# Altium PCB PCB1.PcbDoc
Units mil, origin at the board's own origin, x right, y up, seen from the top; angles counter-clockwise.
Board outline 6000 x 4000 mil, 2 copper layers (Top Layer, Bottom Layer); 60 components, 44 nets, 172 pads, 26 vias.
Unrouted connection lines stored in the file: 71.
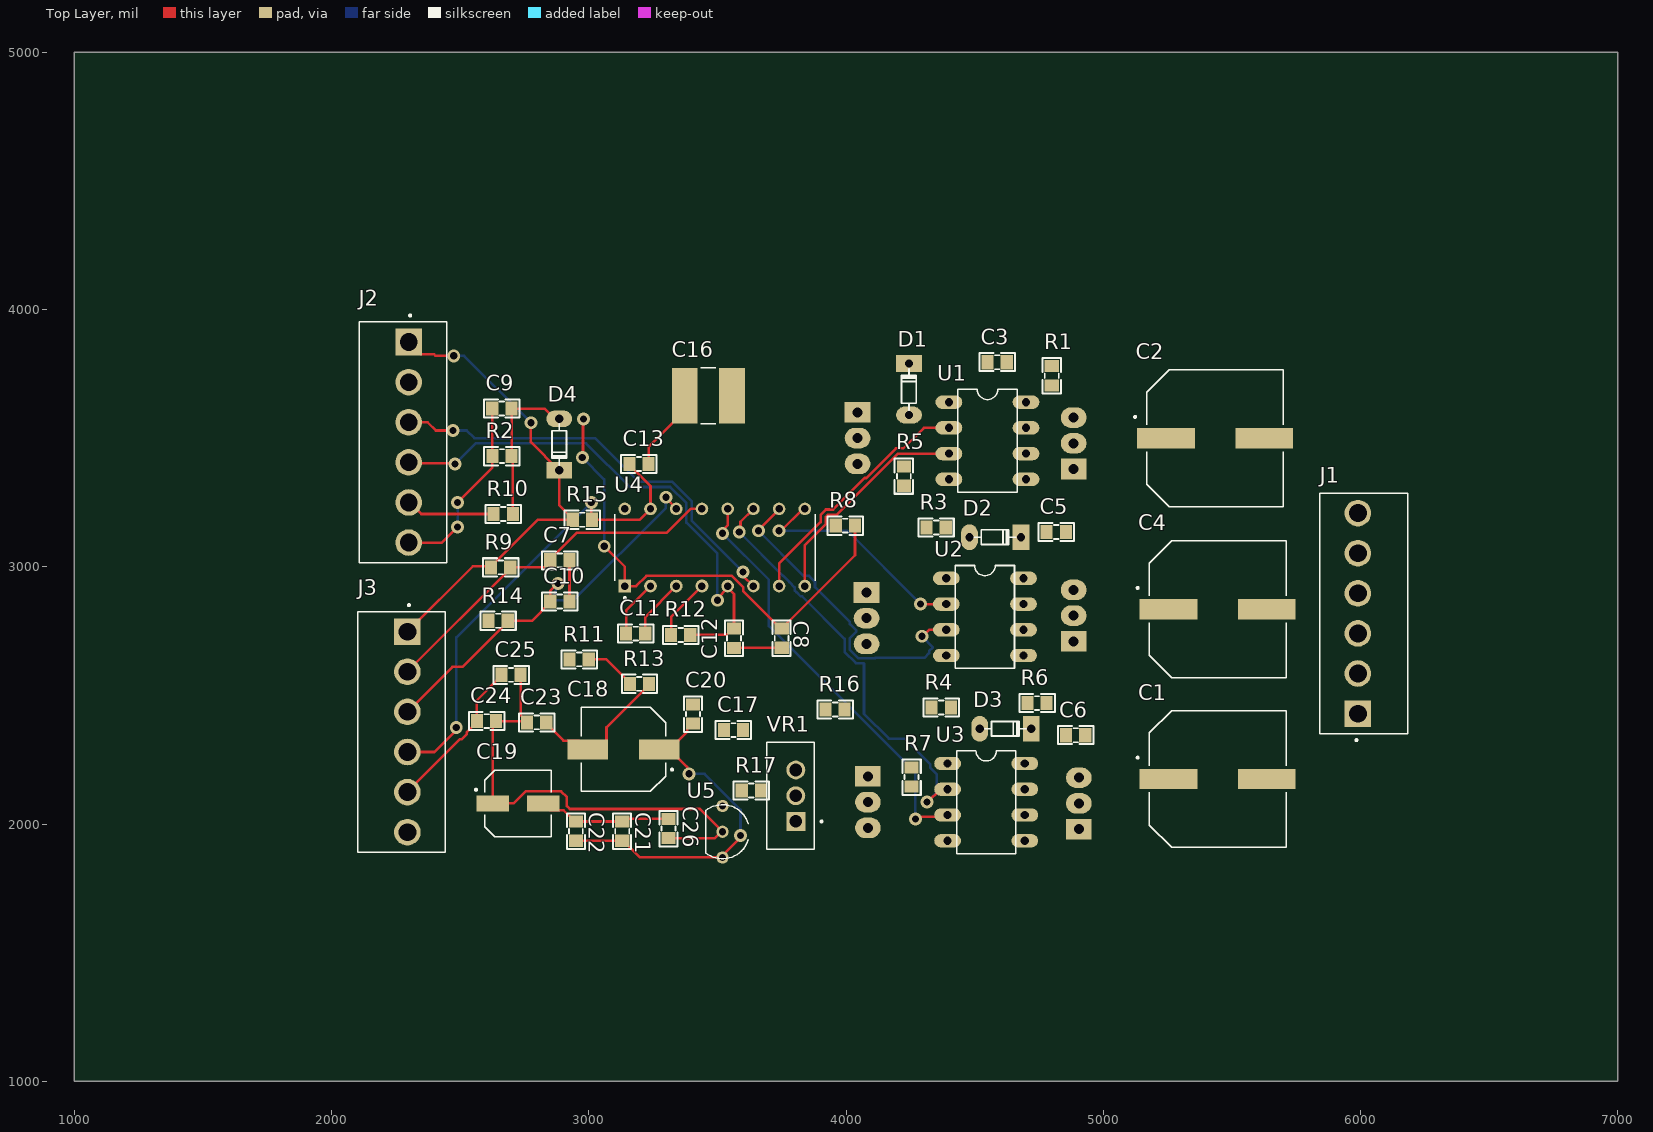
[diagram p0: Top Layer view]
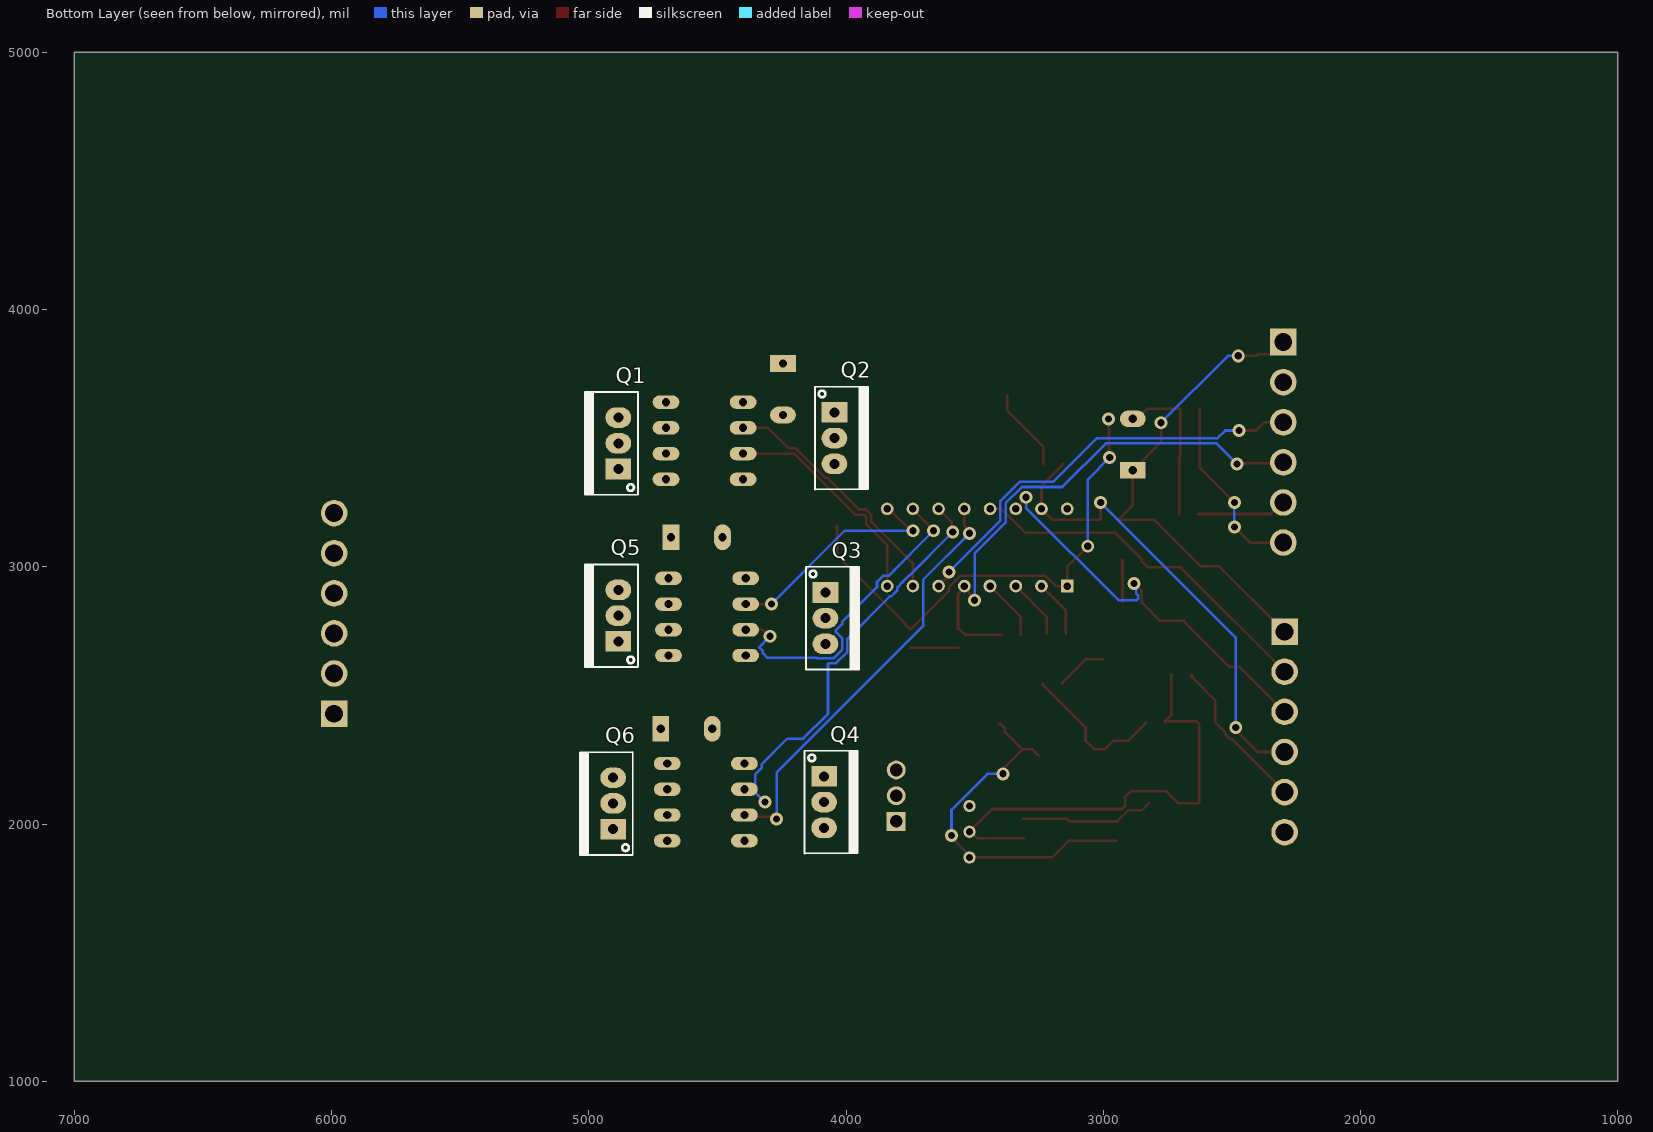
[diagram p1: Bottom Layer view, seen from below]

## Layer stack, top to bottom
Top Solder: solder mask 0.4, Solder Resist, Dk 3.5
Top Layer: signal copper 1.4
Dielectric 1: dielectric 12.6, FR-4, Dk 4.8
Bottom Layer: signal copper 1.4
Bottom Solder: solder mask 0.4, Solder Resist, Dk 3.5

## Board outline
1000,1000 7000,1000 7000,5000 1000,5000

## Design rules (kind name [scope] priority, off if disabled: settings)
Clearance Clearance_2 [All] p1: gap=10 ignorepadtopadclearanceinfootprint=FALSE
Clearance 15V [InNet('15V')] p2: gap=10 ignorepadtopadclearanceinfootprint=FALSE except(20: Arc-Arc Arc-Track Track-Track)
Clearance [All] p3: gap=10 ignorepadtopadclearanceinfootprint=FALSE
PolygonConnect [All] p1: connectstyle=Relief reliefconductorwidth=10 reliefentries=4 polygonreliefangle="90 Angle" airgapwidth=10
RoutingVias [All] p1: holewidth=28 width=50 viastyle="Through Hole" minholewidth=28 minwidth=50 maxholewidth=28 maxwidth=50
SolderMaskExpansion [All] p1: expansion=4 istentingtop=FALSE
SupplyNets "Schematic Supply Nets_2" [InNet('VCC')] p1: voltage=0.000
SupplyNets "Schematic Supply Nets_1" [InNet('+5')] p2: voltage=0.000
SupplyNets "Schematic Supply Nets" [InNet('GND')] p3: voltage=0.000
Width [All] p1: maxlimit=10 minlimit=10 preferedwidth=10
Width GND [InNet('GND')] p2: maxlimit=62 minlimit=19 preferedwidth=47 minimp=50.000000 maximp=50.000000 favimp=50.000000
Width 5V [InNet('+5')] p3: maxlimit=62 minlimit=19 preferedwidth=47 minimp=50.000000 maximp=50.000000 favimp=50.000000
30 further rules are at their usual default settings.

## Classes and differential pairs
net class Power: 15V +5 GND VCC

## Components (designator, comment, footprint, x,y, rotation, side; value= is the part's Value field where it differs from the comment)
C1 "100uF/63V" CAP_EEVTG1J101Q 5445,2175 r0 top
C2 "100uF/63V" CAP_EEVTG1J101Q 5435,3500 r0 top
C3 "105P" "tu 0805" 4587.23,3795.13 r0 top
C4 "100uF/63V" CAP_EEVTG1J101Q 5445,2835 r0 top
C5 "105P" "tu 0805" 4817.23,3135.13 r0 top
C6 "105P" "tu 0805" 4892.43,2345.13 r0 top
C7 "103" "tu 0805" 2887.43,3025.13 r0 top
C8 "104P" "tu 0805" 3749.87,2722.23 r90 top
C9 "105" "tu 0805" 2662.57,3614.87 r180 top
C10 "103" "tu 0805" 2887.23,2865.13 r0 top
C11 "474" "tu 0805" 3182.23,2740.13 r0 top
C12 "104P" "tu 0805" 3564.87,2722.43 r270 top
C13 "103" "tu 0805" 3195,3400 r0 top
C16 "47uF/50V" CAPC6050X550N 3465,3665 r0 top
C17 "104P" "tu 0805" 3562.43,2365.13 r0 top
C18 "100uF/25V" CAP_EEEHA1E101AP 3135,2290 r180 top
C19 "47uF/16V" CAP_EEE1CA470AP 2725,2080 r0 top
C20 "104P" "tu 0805" 3404.87,2427.43 r90 top
C21 "104P" "tu 0805" 3129.87,1972.23 r90 top
C22 "104P" "tu 0805" 2949.87,1972.23 r90 top
C23 "104P" "tu 0805" 2797.23,2395.13 r0 top
C24 "104P" "tu 0805" 2602.77,2399.87 r180 top
C25 "104P" "tu 0805" 2697.77,2579.87 r180 top
C26 "104P" "tu 0805" 3309.87,1982.23 r90 top
D1 "1N4148" "DIODE 0.5A"#1 4245,3690 r270 top
D2 "1N4148" "DIODE 0.5A"#1 4580,3115 r180 top
D3 "1N4148" "DIODE 0.5A"#1 4620,2370 r180 top
D4 "1N4148" "DIODE 0.5A"#2 2885,3475 r90 top
J1 "OUT" VALCON_VH396-06S-010 5990,2818.86 r90 top
J2 "CON4" VALCON_VH396-06S-010 2300,3483.86 r270 top
J3 "CON5" VALCON_VH396-06S-010 2295,2357.95 r270 top
Q1 "IRF3709" TO220 4885,3380 r90 bottom
Q2 "IRF3709" TO220 4045,3600 r270 bottom
Q3 "IRF3709" TO220 4080,2900 r270 bottom
Q4 "IRF3709" TO220 4085,2185 r270 bottom
Q5 "IRF3709" TO220 4885,2710 r90 bottom
Q6 "IRF3709" TO220 4905,1980 r90 bottom
R1 "100R" "tro smd 0805" 4802.39,3742.77 r270 top
R2 "100K" "tro smd 0805" 2662.43,3432.39 r0 top
R3 "100R" "tro smd 0805" 4350,3155 r0 top
R4 "100R" "tro smd 0805" 4370,2455 r0 top
R5 "100R" "tro smd 0805" 4227.39,3352.77 r270 top
R6 "100R" "tro smd 0805" 4742.77,2467.61 r180 top
R7 "100R" "tro smd 0805" 4252.61,2182.43 r90 top
R8 "4.7K" "tro smd 0805" 3997.43,3162.39 r0 top
R9 "2.2K" "tro smd 0805" 2657.43,3000.13 r0 top
R10 "10K" "tro smd 0805" 2667.23,3207.39 r0 top
R11 "10K" "tro smd 0805" 2962.43,2642.39 r0 top
R12 "10K" "tro smd 0805" 3357.57,2732.61 r180 top
R13 "1k" "tro smd 0805" 3197.23,2542.39 r180 top
R14 "2.2K" "tro smd 0805" 2647.23,2792.39 r0 top
R15 "2.2K" "tro smd 0805" 2975,3185 r0 top
R16 "10K" "tro smd 0805" 3957.57,2442.61 r180 top
R17 "1K" "tro smd 0805" 3632.23,2132.39 r0 top
U1 "IR2101" DIL08 4545,3490 r0 top
U2 "IR2101" DIL08 4535,2805 r0 top
U3 "IR2101" DIL08 4540,2085 r0 top
U4 "SN754410NEE4" DIP762W45P254L1980H508Q16 3490,3075 r90 top
U5 "78L05ACZ" TO-92 3520,1970 r270 top
VR1 "LM317T/NOPB" TO254P1054X470X1955-3 3805,2110 r90 top

## Footprints (in the part's own frame and the unit in brackets; to place one, negate y for a bottom-side part, rotate by r counter-clockwise, add the part's x,y. Pads: shape width x height; smd on the part's side, far side on the other; paste and mask are expansions set on the pad)
CAP_EEE1CA470AP [mm]
  rect 3.2x1.6 smd: 1(-2.5,0) 2(2.5,0)
  silkscreen extent -4.25,-3.3 3.3,3.3, body extent -3.65,-3.3 3.65,3.3, height 5.8
CAP_EEEHA1E101AP [mm]
  rect 4x2 smd: 1(-3.55,0) 2(3.55,0)
  silkscreen extent -4.9,-4.15 4.15,4.15, body extent -4.85,-4.15 4.85,4.15, height 10.2
CAP_EEVTG1J101Q [mm]
  rect 5.7x2 smd: 1(-4.85,0) 2(4.85,0)
  silkscreen extent -8,-6.75 6.75,6.75, body extent -7.45,-6.75 7.45,6.75, height 13.5
CAPC6050X550N [mm]
  rect 2.53x5.51 smd: 1(-2.336,0) 2(2.336,0)
  silkscreen extent -0.75,-2.75 0.75,2.75, body extent -3,-2.5 3,2.5, height 5.5
DIL08 [mil]
  oval 104x52 hole 32: 1(-145,150) 2(-145,50) 3(-145,-50) 4(-145,-150) 5(155,-150) 6(155,-50) 7(155,50) 8(155,150)
  silkscreen extent -110,-200 120,200, body extent -151,-200 161,190, height 210
"DIODE 0.5A"#1 [mil] "Diode muoi, xung"
  oval 65x100 hole 32: 1(100,0)
  rect 65x100 hole 32: 2(-100,0)
  silkscreen extent -80,-30 80,28, body extent -108,-33 108,32, height 61
"DIODE 0.5A"#2 [mil] "Diode muoi, xung"
  rect 65x100 hole 32: 2(-100,0)
  oval 65x100 hole 32: ""(100,0)
  silkscreen extent -80,-30 80,28, body extent -108,-33 108,32, height 61
DIP762W45P254L1980H508Q16 [mm]
  rect 1.248x1.248 hole 0.74: 1(-3.81,8.89)
  round 1.248 hole 0.74: 2(-3.81,6.35) 3(-3.81,3.81) 4(-3.81,1.27) 5(-3.81,-1.27) 6(-3.81,-3.81) 7(-3.81,-6.35) 8(-3.81,-8.89) 9(3.81,-8.89) 10(3.81,-6.35) 11(3.81,-3.81) 12(3.81,-1.27) 13(3.81,1.27) 14(3.81,3.81) 15(3.81,6.35) 16(3.81,8.89)
  silkscreen extent -5.1,-9.9 3.3,9.9, body extent -3.81,-9.78 3.81,10.03, height 5.08
TO220 [mil] "TO-220"
  rect 80x100 hole 39: 1(0,0)
  oval 80x100 hole 39: 2(100,0) 3(200,0)
  silkscreen extent -100,-76 300,130, body extent -95,-80 295,97, height 323
TO254P1054X470X1955-3 [mm]
  rect 1.86x1.86 / inner round 1.86 / far side rect 1.86x1.86 hole 1.24: 1(-2.54,0)
  round 1.86 hole 1.24: 2(0,0) 3(2.54,0)
  silkscreen extent -5.27,-2.64 5.27,2.86, body extent -5.1,-2.25 5.1,2.25, height 19.68
TO-92 [mm]
  round 1.208 hole 0.7: 1(-2.54,0) 2(0,0) 3(2.54,0)
  silkscreen extent -2.66,-1.65 2.66,2.55, body extent -2.41,-1.84 2.41,1.84, height 5.34
"tro smd 0805" [mm]
  rect 1.2x1.4 smd: 1(-0.946,-0.061) 2(0.954,-0.061)
  silkscreen extent -1.75,-0.97 1.75,0.84, body extent -1.56,-0.76 1.44,0.64, height 0.53
"tu 0805" [mm] "Compoment SMD 80x50mil"
  rect 1.2x1.4 smd: 1(-0.946,-0.003) 2(0.954,-0.003)
  silkscreen extent -1.75,-0.89 1.75,0.89, body extent -1.01,-0.64 1.01,0.63, height 0.61
VALCON_VH396-06S-010 [mm]
  rect 2.625x2.625 / inner round 2.625 / far side rect 2.625x2.625 hole 1.75: 01(-9.9,0)
  round 2.625 hole 1.75: 02(-5.94,0) 03(-1.98,0) 04(1.98,0) 05(5.94,0) 06(9.9,0)
  silkscreen extent -12.62,-4.9 11.88,3.75, body extent -11.88,-4.9 11.88,3.75, height 10.9

## Part data
C1 C2 C4: library part EEVTG1J101Q, "100ÂµF 63V Aluminum Electrolytic Capacitors Radial, Can - SMD 260mOhm @ 100kHz 2000 Hrs @ 125Â°C", Package="RADIAL-2 Panasonic", Availability="In Stock", Check_prices=https://www.snapeda.com/parts/EEVTG1J101Q/Panasonic/view-part/?ref=eda, MF=Panasonic, MP=EEVTG1J101Q, Price=None, Purchase-URL=https://pricing.snapeda.com/search/part/EEVTG1J101Q/?ref=eda, SnapEDA_Link=https://www.snapeda.com/parts/EEVTG1J101Q/Panasonic/view-part/?ref=snap
C3 C5 C6 C8 C9 C11 C12 C20 C21 C22 C23 C24 C25 C26: library part "Tu 0805 472 50V 20%", "Dán", Chung_Loai=Dán, Don_Vi=Con, Ma_Hang=MH004363, So_Chan=2, Ten_Linh_Kien="Tụ 0805 472-4.7nF 20% 50V"
C7 C10 C13: library part "Tu 0805 471 50V 10%", "Dán", Chung_Loai=Dán, Don_Vi=Con, Ma_Hang=MH004564, So_Chan=2, Ten_Linh_Kien="Tụ 0805 471-470 10% 50V"
C16: library part CKG57NX7R1H476M500JJ, Package="6050 TDK", Availability="In Stock", Check_prices=https://www.snapeda.com/parts/CKG57NX7R1H476M500JJ/TDK/view-part/?ref=eda, MF=TDK, MP=CKG57NX7R1H476M500JJ, Price=None, Purchase-URL=https://pricing.snapeda.com/search/part/CKG57NX7R1H476M500JJ/?ref=eda, SnapEDA_Link=https://www.snapeda.com/parts/CKG57NX7R1H476M500JJ/TDK/view-part/?ref=snap
C17: library part "Tu 0805 472 50V 20%", "Tu 0805 472 50V 20% / SMD", Chung_Loai=Dán, Don_Vi=Con, Ma_Hang=MH004363, So_Chan=2, Ten_Linh_Kien="Tụ 0805 472-4.7nF 20% 50V"
C18: library part EEEHA1E101AP, "100ÂµF 25V Aluminum Electrolytic Capacitors Radial, Can - SMD 1000 Hrs @ 105Â°C", Package="RADIAL-2 Panasonic", Availability="In Stock", Check_prices=https://www.snapeda.com/parts/EEE-HA1E101AP/Panasonic/view-part/?ref=eda, MF=Panasonic, MP=EEE-HA1E101AP, Price=None, Purchase-URL=https://pricing.snapeda.com/search/part/EEE-HA1E101AP/?ref=eda, SnapEDA_Link=https://www.snapeda.com/parts/EEE-HA1E101AP/Panasonic/view-part/?ref=snap
C19: library part EEE1CA470AP, "47ÂµF 16V Aluminum Electrolytic Capacitors Radial, Can - SMD 2000 Hrs @ 85Â°C", Package="RADIAL-2 Panasonic", Availability="In Stock", Check_prices=https://www.snapeda.com/parts/EEE-1CA470AP/Panasonic/view-part/?ref=eda, MF=Panasonic, MP=EEE-1CA470AP, Price=None, Purchase-URL=https://pricing.snapeda.com/search/part/EEE-1CA470AP/?ref=eda, SnapEDA_Link=https://www.snapeda.com/parts/EEE-1CA470AP/Panasonic/view-part/?ref=snap
D1 D2 D3 D4: library part "Diode 1N4148", "Cắm", Chung_Loai=Cắm, Don_Vi=Con, Ma_Hang=MH001065, Ten_Linh_Kien="Diode 1N4148 DO35 450mA 100V ( 1N4148 DIP)"
J1 J2 J3: library part VH396-06S-010, "VH396 - Valcon 3.96mm 5A Wire-to-Board Straight Locking Power Connector", Package=None, Availability="In Stock", Check_prices=https://www.snapeda.com/parts/VH396-06S-010/Valcon/view-part/?ref=eda, MF=Valcon, MP=VH396-06S-010, Price=None, Purchase-URL=https://pricing.snapeda.com/search/part/VH396-06S-010/?ref=eda, SnapEDA_Link=https://www.snapeda.com/parts/VH396-06S-010/Valcon/view-part/?ref=snap
Q1 Q2 Q3 Q4 Q5 Q6: library part "IRF3709 DIP", "N-Channel Power MOSFET"
R1 R2 R3 R4 R5 R6 R7 R8 R9 R10 R11 R12 R13 R14 R15 R16 R17: library part "Tro 0805 1% 1k", "Dán", Chung_Loai=Dán, Don_Vi=Con, Ma_Hang=MH005468, So_Chan=2, Ten_Linh_Kien="Trở 0805 1% 1k"
U1 U2 U3: "Half-Bridge Gate Driver IC Non-Inverting 8-PDIP", Package="DIP-8 International Rectifier", Check_prices=https://www.snapeda.com/parts/IR2101/Infineon+Technologies/view-part/?ref=eda, Digi-Key_Part_Number=IR2101-ND, MF=Infineon, MP=IR2101, Purchase-URL=https://pricing.snapeda.com/search/part/IR2101/?ref=eda, SnapEDA_Link=https://www.snapeda.com/parts/IR2101/Infineon+Technologies/view-part/?ref=snap
U4: "Quadruple Half-H Drivers 16-PDIP -40 to 85", Package="PDIP-16 Texas Instruments", Availability="In Stock", Check_prices=https://www.snapeda.com/parts/SN754410NEE4/Texas+Instruments/view-part/?ref=eda, MF="Texas Instruments", MP=SN754410NEE4, Price=None, Purchase-URL=https://pricing.snapeda.com/search/part/SN754410NEE4/?ref=eda, SnapEDA_Link=https://www.snapeda.com/parts/SN754410NEE4/Texas+Instruments/view-part/?ref=snap
U5: "Linear Voltage Regulator IC Positive Fixed 1 Output 100mA TO-92-3", Package="TO-92 ON", Availability="In Stock", Check_prices=https://www.snapeda.com/parts/78L05ACZ/STMicroelectronics/view-part/?ref=eda, MF=STMicroelectronics, MP=78L05ACZ, Price=None, Purchase-URL=https://pricing.snapeda.com/search/part/78L05ACZ/?ref=eda, SnapEDA_Link=https://www.snapeda.com/parts/78L05ACZ/STMicroelectronics/view-part/?ref=snap
VR1: "Linear Voltage Regulator IC Positive Adjustable 1 Output 1.5A TO-220-3", Package="TO-220-3 STMicroelectronics", Check_prices=https://www.snapeda.com/parts/LM317T/STMicroelectronics/view-part/?ref=eda, MF=STMicroelectronics, MP=LM317T, SnapEDA_Link=https://www.snapeda.com/parts/LM317T/STMicroelectronics/view-part/?ref=snap

## Via types
v1: diameter 50, hole 28, Top Layer to Bottom Layer, 26 vias

## Nets (pads, with @x,y where several pads share a name; then routed paths per layer and width w, separated by ;. In a path a pad name is that pad's centre, name@x,y a point inside that pad or via, vN(x,y) a via of type N, cw(c..) or ccw(c..) an arc to the next point about the centre after c; other vN are vias at no path point)
15V: R17.1 VR1.2
+5: D4.2 J2.01 J3.01 R8.1 R9.1 R12.2 R14.1 R15.1 U4.4 | length 2112.2
  Top Layer w10: J3.01 2548.96,3001.68 2620.2,3001.68 2801.12,3182.61 R15.1 2937.77,3186.54 2885,3239.32 D4.2 2775,3485 v1(2775,3560) ; J2.01 2346.67,3826.95 2398.12,3826.95 2405.07,3820 v1(2475,3820) ; R12.2 3320,2805 3439.57,2924.57 v1(3440,2924.57)
  Bottom Layer w10: v1(2475,3820) 2515,3820 v1(2775,3560)
AB: U1.3 U4.8 | length 883
  Top Layer w10: U4.8 3840,3083.91 3921.57,3165.49 3921.57,3193.77 3930.36,3202.56 3965.16,3202.56 4202.61,3440 U1.3
AT: U1.2 U4.7 | length 982.4
  Top Layer w10: U4.7 3740,3012.2 3901.57,3173.77 3901.57,3202.06 3922.08,3222.56 3950.36,3222.56 4072.8,3345 4079.32,3345 4194.32,3460 4222.61,3460 4302.61,3540 U1.2
BB: U2.3 U4.10 | length 1285.5
  Top Layer w10: v1(3660,3140) 3660,3142.5 3740,3222.5 U4.10 ; v1(4295,2730) 4298,2730 4323,2755 U2.3
  Bottom Layer w10: v1(3660,3140) 3835.43,2964.57 3856.39,2964.57 3879.57,2941.39 3879.57,2920.43 4015,2785 4015,2777.22 4040,2752.22 4040,2747.78 4015,2722.78 4015,2677.22 4047.22,2645 4112.78,2645 4113.89,2646.11 4305,2646.11 4323,2664.11 4323,2671.98 4338.01,2686.99 v1(4295,2730)
BT: U2.2 U4.9 | length 903.3
  Top Layer w10: v1(3740,3140) 3747.5,3140 3832.5,3225 U4.9 ; v1(4290,2855) U2.2
  Bottom Layer w10: v1(3740,3140) 4005,3140 v1(4290,2855)
CB: U3.3 U4.12 | length 1655.2
  Top Layer w10: v1(3520,3130) 3520,3140.82 3540,3160.82 U4.12 ; v1(4270,2020) 4277.5,2027.5 4387.5,2027.5 U3.3
  Bottom Layer w10: v1(3520,3130) 3700.43,2949.57 3700.43,2769.57 4270,2200 v1(4270,2020)
CT: U3.2 U4.11 | length 1653.3
  Top Layer w10: v1(3585,3135) 3590,3140 3590,3175 U4.11 ; v1(4315,2085) 4317,2085 4367,2135 U3.2
  Bottom Layer w10: v1(3585,3135) 3755.43,2964.57 3756.39,2964.57 3779.57,2941.39 3779.57,2940.43 3800.43,2919.57 3800.43,2908.61 3807.02,2902.02 3823.61,2885.43 3829.57,2885.43 3995,2720 3995,2668.93 4038.93,2625 4067.22,2625 4070,2622.22 4070,2428.28 4166.64,2331.64 4228.36,2331.64 4328,2232 4328,2218.02 4352.02,2194 4352.02,2122.02 v1(4315,2085)
EL: C8.2 J2.02 R8.2 U4.1 | length 1961
  Top Layer w10: v1(2975,3425) 2977.5,3427.5 2977.5,3572.5 v1(2980,3575) ; v1(3060,3080) 3140,3000 U4.1 3184.04,2925 3223.61,2964.57 3556.39,2964.57 3600.43,2920.52 3600.43,2905.43 3746.06,2759.8 C8.2 3753.94,2759.8 3772.56,2778.43 3772.56,2782.36 4035,3044.8 R8.2
  Bottom Layer w10: v1(2975,3425) 3060,3340 v1(3060,3080)
GND: C1.2 C2.2 C4.2 C7.2 C8.1 C9.2 C10.2 C11.2 C12.2 C13.2 C16.1 C17.2 C18.2 C19.2 C20.2 C21.2 C22.2 C23.2 C24.2 C25.2 C26.2 J1.02 J2.06 J3.05 R2.1 R13.1 R16.2 U1.4 U2.4 U3.4 U4.3 | length 3352.4
  Top Layer w10: J3.05 2295,2125.87 2499.13,2330 2506.57,2330 2525,2348.43 2525,2355.87 2565.2,2396.06 C24.2 2565.2,2481.06 2655,2570.87 2655,2580 C25.2 ; J2.06 2429.09,3094.09 v1(2490,3155) ; v1(2490,3250) 2625.2,3385.2 R2.1 2625,3430.2 C9.2 ; C19.2 2849.92,2053.5 2902.36,2053.5 2946.06,2009.8 C22.2 C21.2 3140,2019.8 C26.2 ; C23.2 2834.8,2391.06 2901.5,2324.37 2960.87,2324.37 C18.2 3034.61,2290 3068.98,2324.37 3068.98,2375.37 3234.46,2540.85 R13.1 ; C10.2 2925,2865.2 C7.2 ; C11.2 3219.8,2804.8 U4.3 ; C13.2 3232.57,3465.88 3373.03,3606.34 C16.1 ; C12.2 3564.88,2685 C8.1
  Bottom Layer w10: v1(2490,3155) v1(2490,3250)
Ha: C7.1 J3.02 R9.2 U4.13 | length 1415.4
  Top Layer w10: J3.02 2295,2593.8 2695,2993.8 R9.2 2826.87,2997.74 2850.2,3021.06 C7.1 2850.2,3028.94 2953.79,3132.54 3303.49,3132.54 3395.96,3225 U4.13
Hb: C10.1 J3.03 R14.2 U4.14 | length 1575
  Top Layer w10: J3.03 2469.7,2610.6 2509.34,2610.6 2684.8,2786.06 R14.2 2778.94,2790 2850,2861.06 C10.1 2850,2905 v1(2880,2935) ; v1(3300,3270) 3300,3267.5 3340,3227.5 U4.14
  Bottom Layer w10: v1(2880,2935) 2872.35,2927.35 2872.35,2896.52 2864.14,2888.32 2864.14,2875.86 2870,2870 2940.96,2870 3300,3229.04 v1(3300,3270)
Hc: C13.1 J3.04 R15.2 U4.15 | length 1857.2
  Top Layer w10: J3.04@2295,2287.2 J3.04 2400,2280 2485,2365 v1(2485,2375) ; v1(3010,3250) 3010,3185.18 R15.2 3197.61,3182.61 U4.15 3240,3313.7 3157.77,3395.93 C13.1
  Bottom Layer w10: v1(2485,2375) 2485,2725 v1(3010,3250)
IOUT: Q2.3 Q5.3 Q6.3 R11.2 R13.2 | length 201.4
  Top Layer w10: R11.2 3068.38,2640 3159.65,2548.72 R13.2
Is: C11.1 R11.1 U4.2 | length 224.4
  Top Layer w10: C11.1 3145,2830 U4.2
M: J2.03 U4.6 | length 1656.4
  Top Layer w10: J2.03 2373.52,3561.81 2405.46,3529.86 v1(2472.2,3529.86) ; v1(3600,2980) 3600,2965 U4.6
  Bottom Layer w10: v1(2472.2,3529.86) 2525.14,3529.86 2555,3500 3025,3500 3195,3330 3324.85,3330 3399.57,3255.29 3399.57,3180.43 v1(3600,2980)
MA: C3.2 J1.05 Q1.3 Q2.2 U1.6
MB: C5.2 J1.04 Q3.3 Q5.2 U2.6
MC: C6.2 J1.03 Q4.3 Q6.2 U3.6
NetC3_1: C3.1 D1.2 U1.8
NetC5_1: C5.1 D2.2 U2.8
NetC6_1: C6.1 D3.2 U3.8
NetC9_1: C9.1 D4. R2.2 R10.2 | length 613.8
  Top Layer w10: R10.2 2704.8,3425.2 R2.2 2700,3614.8 C9.1 2827.5,3615 2867.5,3575 D4.
NetC18_1: C18.1 C20.1 C21.1 C22.1 U5.3 | length 1409.8
  Top Layer w10: C22.1 C21.1 3133.94,1935 3198.94,1870 U5.3 3520,1877.5 3590,1947.5 v1(3590,1955) ; C18.1@3250,2265.24 C18.1 C18.1@3314.13,2290 ; v1(3390,2195) 3382.35,2202.65 3382.35,2221.79 C18.1@3314.13,2290 ; C20.1 3401.06,2390.2 3382.44,2371.57 3382.44,2358.31 C18.1@3314.13,2290
  Bottom Layer w10: v1(3390,2195) 3449.84,2195 3590,2054.84 v1(3590,1955)
NetC19_1: C19.1 C23.1 C24.1 C25.1 C26.1 U5.2 | length 1860.8
  Top Layer w10: C25.1 2735,2423.94 2760,2398.94 C23.1 2755,2400 C24.1 2626.57,2386.57 C19.1 2707.72,2080 2754.22,2126.5 2892.63,2126.5 2915,2104.13 2915,2070 2926.57,2058.43 3431.57,2058.43 U5.2 3515.16,1970 3490.16,1945 C26.1
NetD1_1: D1.1 U1.1
NetD2_1: D2.1 U2.1
NetD3_1: D3.1 U3.1
NetQ1_1: Q1.1 R1.2
NetQ2_1: Q2.1 R5.1
NetQ3_1: Q3.1 R3.2
NetQ4_1: Q4.1 R4.2
NetQ5_1: Q5.1 R6.1
NetQ6_1: Q6.1 R7.1
NetR1_1: R1.1 U1.7
NetR3_1: R3.1 U2.7
NetR4_1: R4.1 U3.7
NetR5_2: R5.2 U1.5
NetR6_2: R6.2 U2.5
NetR7_2: R7.2 U3.5
NetR16_1: R16.1 R17.2 VR1.1
VCC: C1.1 C2.1 C4.1 C16.2 C17.1 J1.01 Q1.2 Q3.2 Q4.2 VR1.3
VR: J2.05 R10.1 U4.16 | length 348.6
  Top Layer w10: J2.05 2304.29,3250 2349.29,3205 R10.1
Z/F: C12.1 J2.04 R12.1 U4.5 | length 2059.4
  Top Layer w10: J2.04 2302.95,3402.95 2477.05,3402.95 v1(2480,3400) ; R12.1 3536.14,2735 3560.8,2759.65 C12.1 3564.73,2893.78 U4.5@3540,2918.51 ; v1(3500,2870) 3500,2877.5 3540,2917.5 U4.5@3540,2918.51 ; U4.5 U4.5@3540,2918.51
  Bottom Layer w10: v1(2480,3400) 2560,3480 2990,3480 3160,3310 3316.57,3310 3379.57,3247 3379.57,3172.15 3500,3051.72 v1(3500,2870)
pads on no net: J1.06 J3.06 U5.1